# EAGLE board stage_light_control (EAGLE 6.6.0)
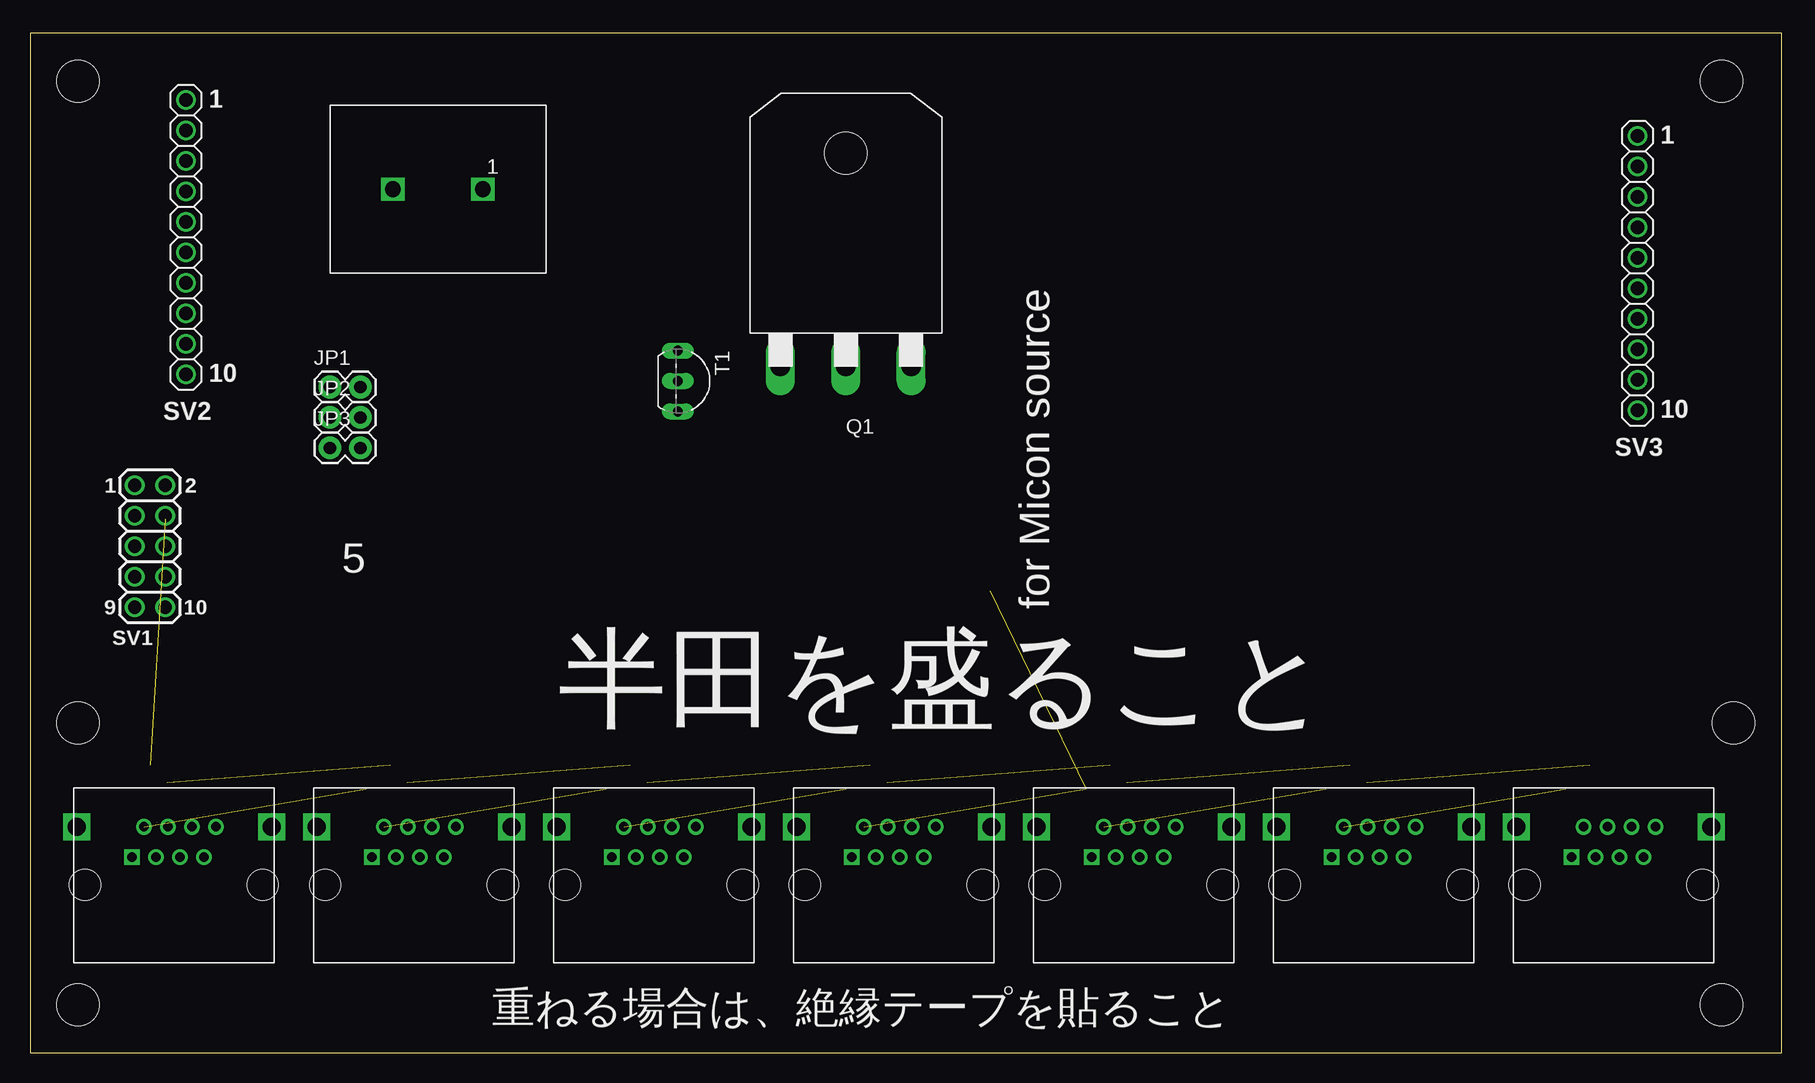
[diagram p0: board, top side]
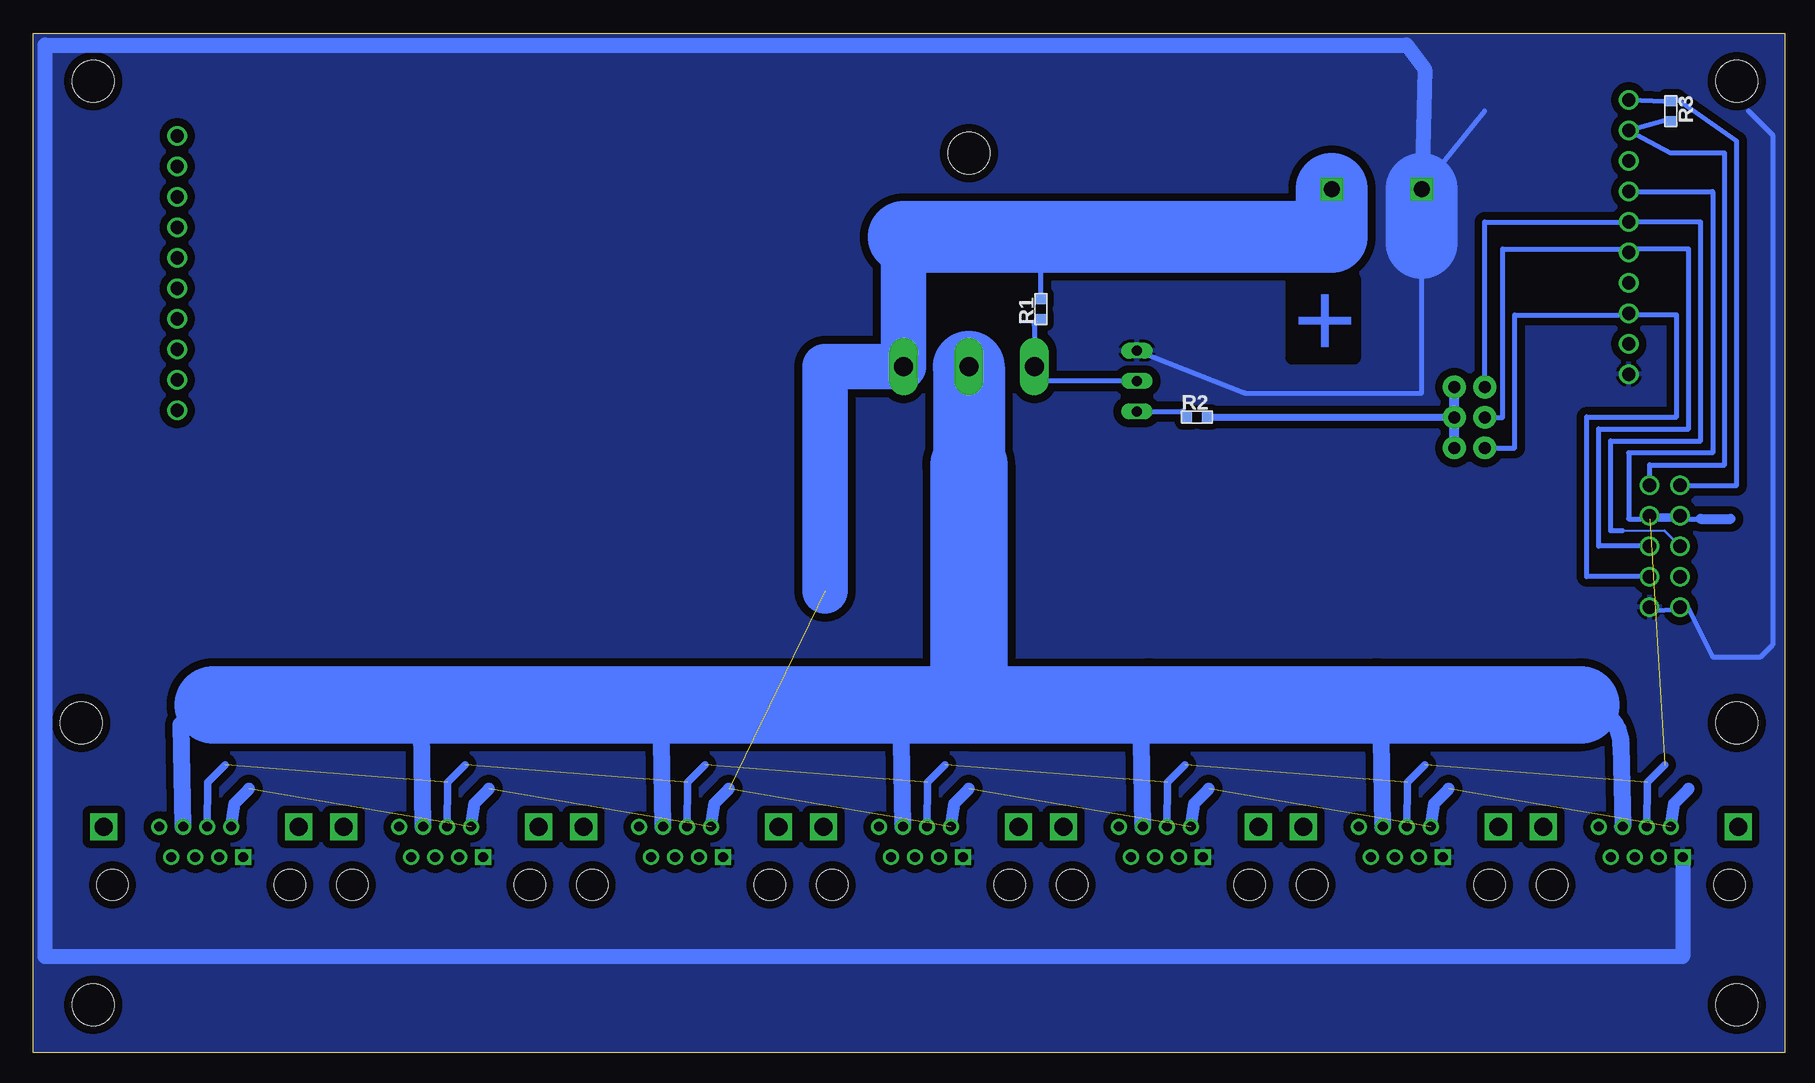
[diagram p1: board, bottom side, seen from below]

Size 146 x 85 mm. Coordinates in mm from the lower left corner, seen from the top.
Outline: 0,0 146,0 146,85 0,85 0,0
Copper layers (1*16): Top 0.035mm / dielectric 1.5mm / Bottom 0.035mm
Design rules "default *": minimum track width 10mil, minimum drill 24mil, track to track 8mil, track to pad 8mil, pad to pad 8mil, via to via 8mil, smd to smd 8mil, copper to edge 0mil, drill to drill 8mil, minimum pad ring 10mil, minimum via ring 8mil, stop-mask expansion 4mil, vias tented up to drill 0mil, thermal gap 10mil
Holes 3.5 mm at 4,4 141,4 4,81 141,81 4,27.5 142,27.5

## Footprints (pad centres in the part's own frame; a part is rotated, then mirrored left to right if it is on the bottom)
RJ-45_7810-8P8C = drill 0.8 square: 1 -3.5,2.3 | drill 0.8: 2 -2.5,4.84; 3 -1.5,2.3; 4 -0.5,4.84; 5 0.5,2.3; 6 1.5,4.84; 7 2.5,2.3; 8 3.5,4.84 | drill 1.5 square: P$1 -8.125,4.84; P$2 8.125,4.84 | hole 2.6: -7.4,0; 7.4,0
1X2-7.5MM = drill 1.3 square: P$1 -3.75,0; P$2 3.75,0
1X02 = drill 1.016 pad 1.88: 1 0,0; 2 2.54,0
TO-3P = drill 1.6 long: 1 -5.45,-2.8; 2 0,-2.8; 3 5.45,-2.8 | hole 3.5: 0,15
1608(1.6*0.8MM) = smd 0.8 x 0.8: P$3 -0.8,0; P$4 0.8,0
2*5(2.54PITCH) = drill 1.1: 1 -1.27,3.81; 2 1.27,3.81; 3 -1.27,1.27; 4 1.27,1.27; 5 -1.27,-1.27; 6 1.27,-1.27; 7 -1.27,-3.81; 8 1.27,-3.81; 9 -1.27,-6.35; 10 1.27,-6.35
1*10(2.54PITCH) = drill 1.1: 1 0,11.43; 2 0,8.89; 3 0,6.35; 4 0,3.81; 5 0,1.27; 6 0,-1.27; 7 0,-3.81; 8 0,-6.35; 9 0,-8.89; 10 0,-11.43
TO92-ECB = drill 0.813 long: B 2.54,0; C 0,0; E -2.54,0

## Placement (x,y rotation side)
CN1  RJ45-8-7810  [RJ-45_7810-8P8C]  132,14 0 top
CN2  RJ45-8-7810  [RJ-45_7810-8P8C]  112,14 0 top
CN3  RJ45-8-7810  [RJ-45_7810-8P8C]  92,14 0 top
CN4  RJ45-8-7810  [RJ-45_7810-8P8C]  72,14 0 top
CN5  RJ45-8-7810  [RJ-45_7810-8P8C]  52,14 0 top
CN6  RJ45-8-7810  [RJ-45_7810-8P8C]  32,14 0 top
CN7  RJ45-8-7810  [RJ-45_7810-8P8C]  12,14 0 top
J1  1X2-7.5MM  [1X2-7.5MM]  34,72 180 top
JP1  [1X02]  25,55.5 0 top
JP2  [1X02]  25,52.96 0 top
JP3  [1X02]  25,50.42 0 top
Q1  2SJ554-SIDEAY  [TO-3P]  68,60 0 top
R1  2k  [1608(1.6*0.8MM)]  62,62 90 bottom
R2  10k  [1608(1.6*0.8MM)]  49,53 0 bottom
R3  10k  [1608(1.6*0.8MM)]  9.5,78.5 270 bottom
SV1  10PIN-HEADER-DOUBLE_2.54PITCH  [2*5(2.54PITCH)]  10,43.5 0 top
SV2  10PIN-HEADERSINGLE_2.54PITCH  [1*10(2.54PITCH)]  13,68 0 top
SV3  10PIN-HEADERSINGLE_2.54PITCH  [1*10(2.54PITCH)]  134,65 0 top
T1  2SC1815  [TO92-ECB]  54,56 270 top

## Library data of the parts
CN1-CN7 J1 = Connector-etc
JP1-JP3 = SparkFun-Retired
Q1 = FET p-ch
R1-R3 = Resistor
SV1-SV3 = Connector-Header-Pin
T1 = transistor

## Nets
GND: CN1.1 CN2.1 CN3.1 CN4.1 CN5.1 CN6.1 CN7.1 J1.P$2 SV1.10 SV2.10 T1.E
N$3: Q1.1 R1.P$3 T1.C
N$4: R2.P$3 T1.B
N$5: JP1.1 SV1.5 SV2.5
N$6: JP2.1 SV1.6 SV2.6
N$7: JP3.1 SV1.8 SV2.8
N$10: CN1.6 CN2.6 CN3.6 CN4.6 CN5.6 CN6.6 CN7.6 Q1.2
N$11: JP1.2 JP2.2 JP3.2 R2.P$4
TAG1: CN1.4 CN2.4 CN3.4 CN4.4 CN5.4 CN6.4 CN7.4 SV1.3 SV1.4 SV2.4
TAG2: R3.P$4 SV1.2 SV2.2
VCC1: R3.P$3 SV1.1 SV2.1
VCC2: CN1.2 CN2.2 CN3.2 CN4.2 CN5.2 CN6.2 CN7.2 J1.P$1 Q1.3 R1.P$4

## Tracks (layer width: path | path; a pad name or v marks a point on that pad's centre or on a via)
GND
  Bottom 0.406: T1.E 45,55 30.25,55 30.25,67.5 | J1.P$2 25,78.5 | 3,78.5 1,76.5 1,34 2,33 6,33 8,37 11,36.88 SV1.10
  Bottom 1.27: CN7.1 8.5,8 145,8 145,84 31.5,84 30,82 J1.P$2
  Bottom 6: 30.25,67.5 J1.P$2
  pour Bottom (isolate 0.65): 0.2,84.8 145.8,84.8 145.8,0.2 0.2,0.2
N$3
  Bottom 0.406: R1.P$3 arc-90 62.55,60.65 Q1.1 arc-90 61.35,56 T1.C
N$4
  Bottom 0.406: T1.B 50.26,53.46 arc90 R2.P$3
N$5
  Bottom 0.15: 10,43.5 13.5,43.5
  Bottom 0.254: SV1.5 10,43.5
  Bottom 0.406: 13.5,43.5 14.5,43.5 14.5,51 7,51 7,69.27 SV2.5 25,69.27 JP1.1
N$6
  Bottom 0.254: 13,67 SV2.6
  Bottom 0.406: SV1.6 15.5,42.23 15.5,52 8,52 8,67 13,67 23.5,67 23.5,52.96 JP2.1
N$7
  Bottom 0.254: 13,61.5 SV2.8
  Bottom 0.406: SV1.8 16.5,39.69 16.5,53 9,53 9,61.5 13,61.5 22.5,61.5 22.5,50.42 JP3.1
N$10
  Bottom 1.422: 17,29 arc90 13.67,25.67 CN7.6 | CN6.6 33.67,28.67 arc-90 34,29 | CN5.6 53.67,28.33 53,29 | CN4.6 73.67,28.33 73,29 | CN1.6 133.67,27.33 131.5,29.5 | 131.5,29.5 131,30 | 131,29 131.5,29.5 | CN2.6 113.67,29.67 114,30 114,29 | CN3.6 93.67,28.33 93,29
  Bottom 6: Q1.2 68,49
  Bottom 6.452: 68,49 68,29 | 68,29 53,29 34,29 17,29 | 68,29 73,29 93,29 114,29 131,29
N$11
  Bottom 0.61: JP2.2 R2.P$4
  Bottom 0.813: JP3.2 JP2.2 JP1.2
TAG1  (7 unrouted)
  Bottom 0.406: SV2.4 6,71.81 6,50 13,50 13,44.5 11.27,44.5 | 11.27,44.5 SV1.4 SV1.3 | 11.27,44.5 7,44.5
  Bottom 0.61: CN7.4 11.44,22.56 10,24 | CN6.4 31.44,22.56 30,24 | CN5.4 51.44,22.56 50,24 | CN4.4 71.44,22.56 70,24 | CN3.4 91.44,22.56 90,24 | CN2.4 111.44,22.56 110,24 | CN1.4 131.44,22.56 130,24
  Bottom 0.813: 7,44.5 4.5,44.5
TAG2
  Bottom 0.254: R3.P$4 10,77.7
  Bottom 0.406: 10,77.7 SV2.2 9.5,75 5,75 5,49 11.27,49 SV1.2
VCC1
  Bottom 0.254: R3.P$3 10,79.3
  Bottom 0.406: 10,79.3 SV2.1 | SV1.1 4,47.31 4,76 9,79.5 R3.P$3
VCC2  (7 unrouted)
  Bottom 0.406: R1.P$4 62,67
  Bottom 1.016: CN7.2 9.22,20.78 8,22 | CN6.2 29.22,20.78 28,22 | CN5.2 49.22,20.78 48,22 | CN4.2 69.22,20.78 68,22 | CN3.2 89.22,20.78 88,22 | CN2.2 109.22,20.78 108,22 | CN1.2 129.22,20.78 128,22
  Bottom 1.27: 62,67 70.5,67 70.5,68
  Bottom 3.81: 73.45,68 Q1.3 80,57.2 80,38.5
  Bottom 6: 73.45,68 70.5,68 37.75,68 J1.P$1

## Text on the board
Bottom: +
tPlace: 5 | for Micon source | 半田を盛ること | 重ねる場合は、絶縁テープを貼ること